# Altium PCB 3 Phase NPC Inverter.PcbDoc (part 1 of 2)
Units mm, origin at the board's own origin, x right, y up, seen from the top; angles counter-clockwise.
Board outline 302.85 x 157.72 mm, 6 copper layers (Top Layer, Reg_10_Pos, Pulse_Pos, Pulse_Neg, Reg_10_GND, Bottom Layer), stack 0.816 mm thick; 134 components, 89 nets, 487 pads, 1180 vias.
Unrouted connection lines stored in the file: 6.
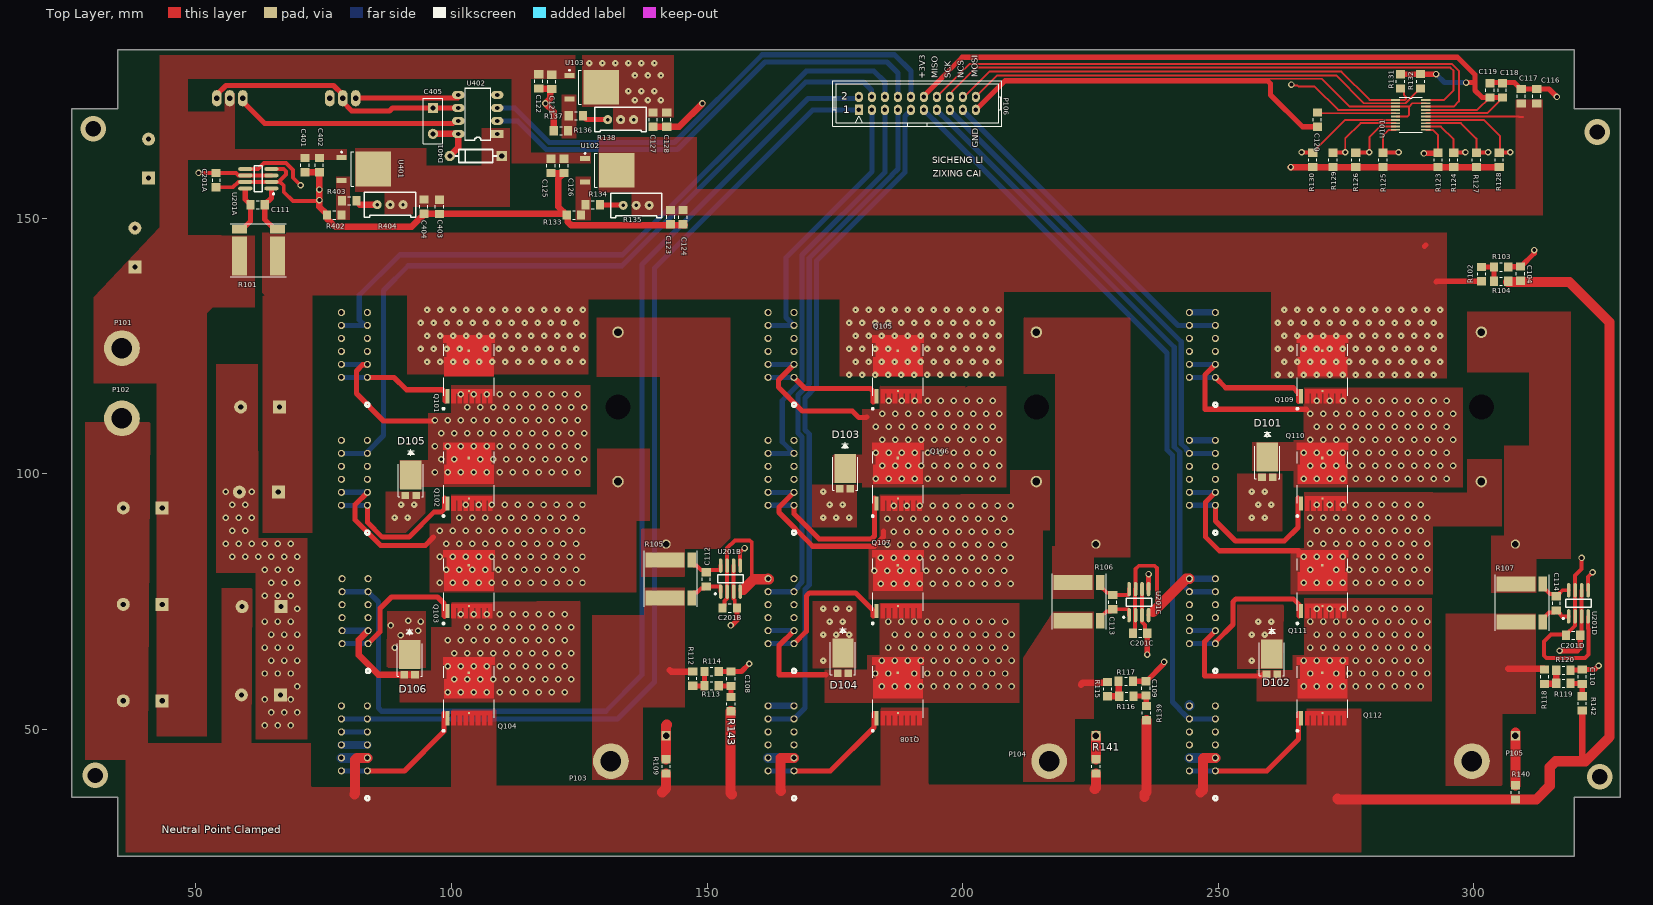
[diagram p0: Top Layer view]
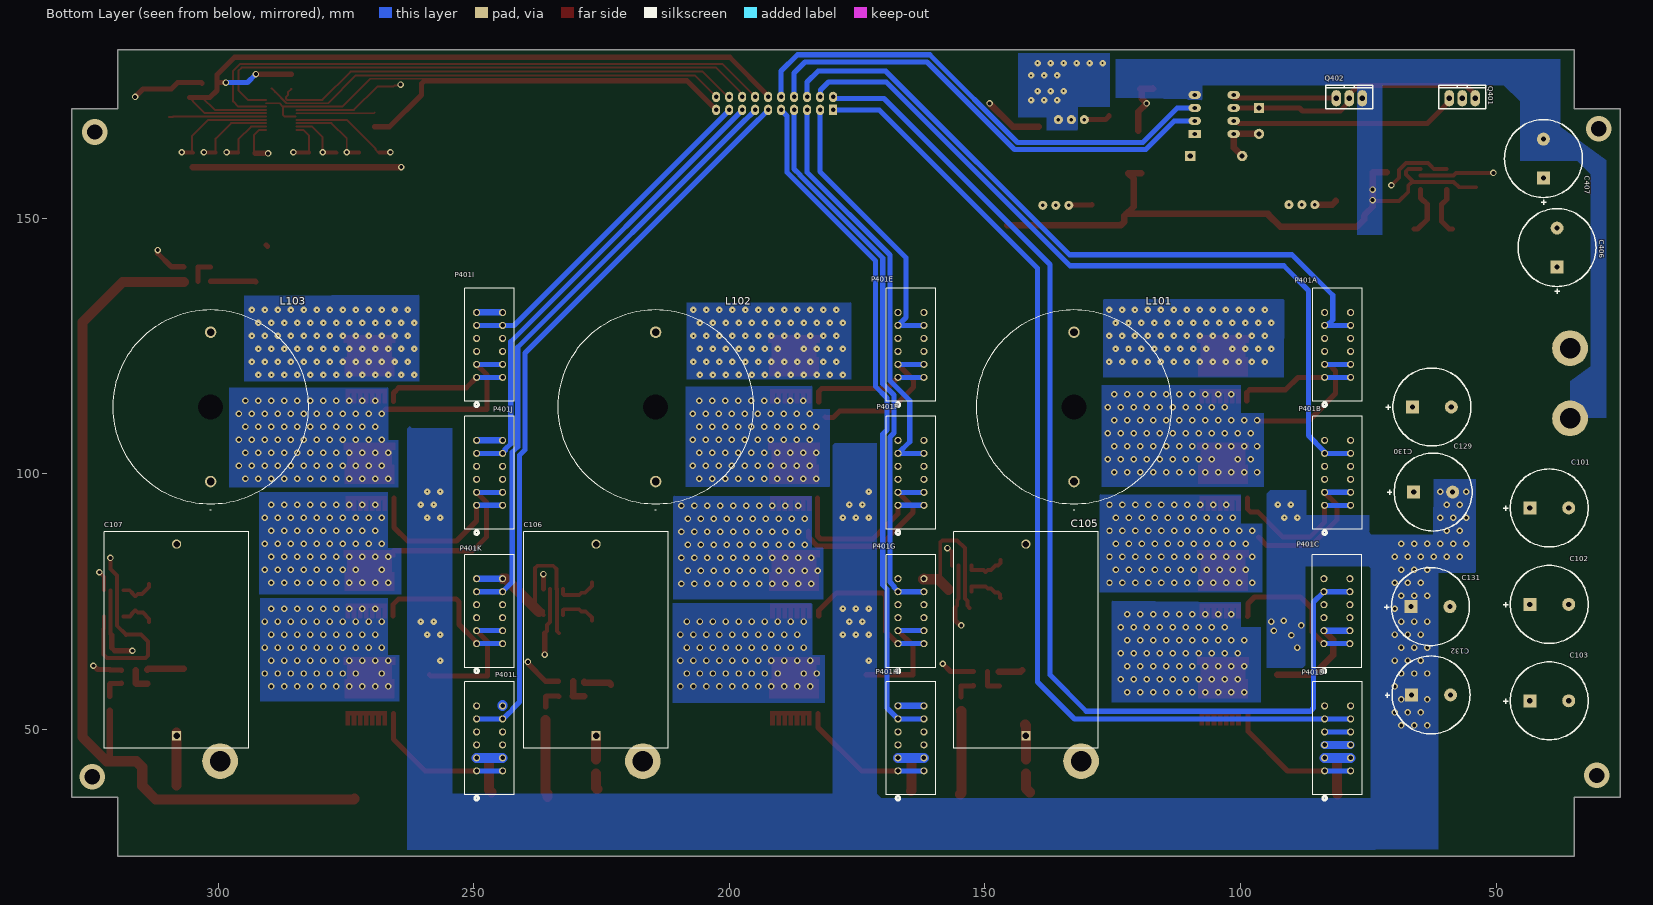
[diagram p1: Bottom Layer view, seen from below]
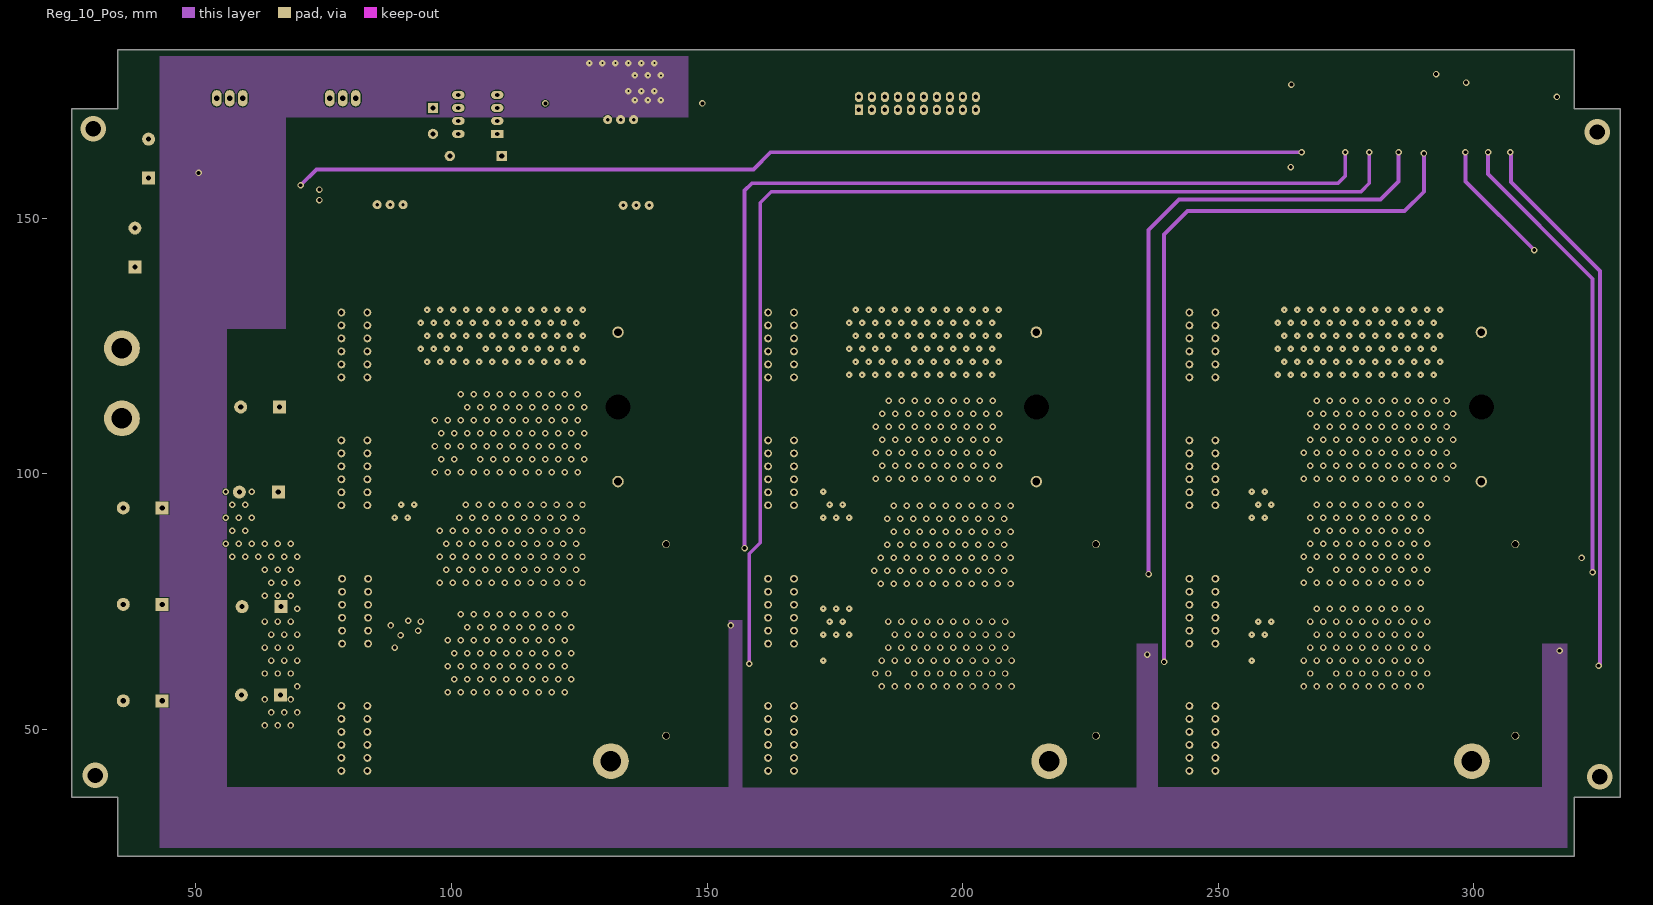
[diagram p2: Reg_10_Pos]
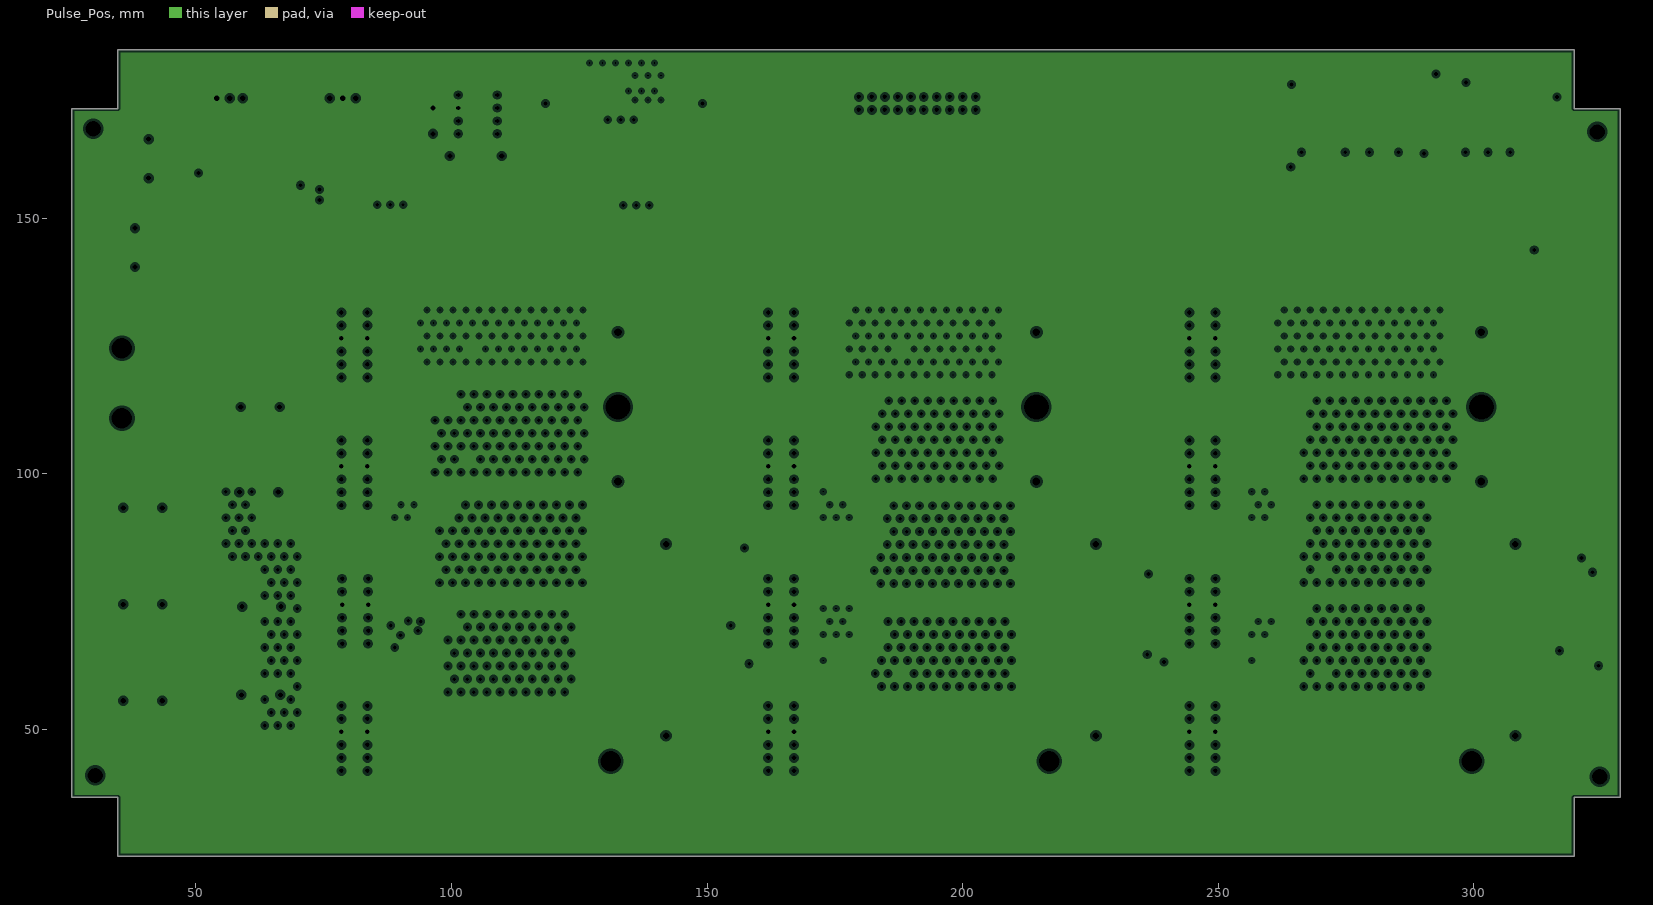
[diagram p3: Pulse_Pos, clearances drawn from the general rule]
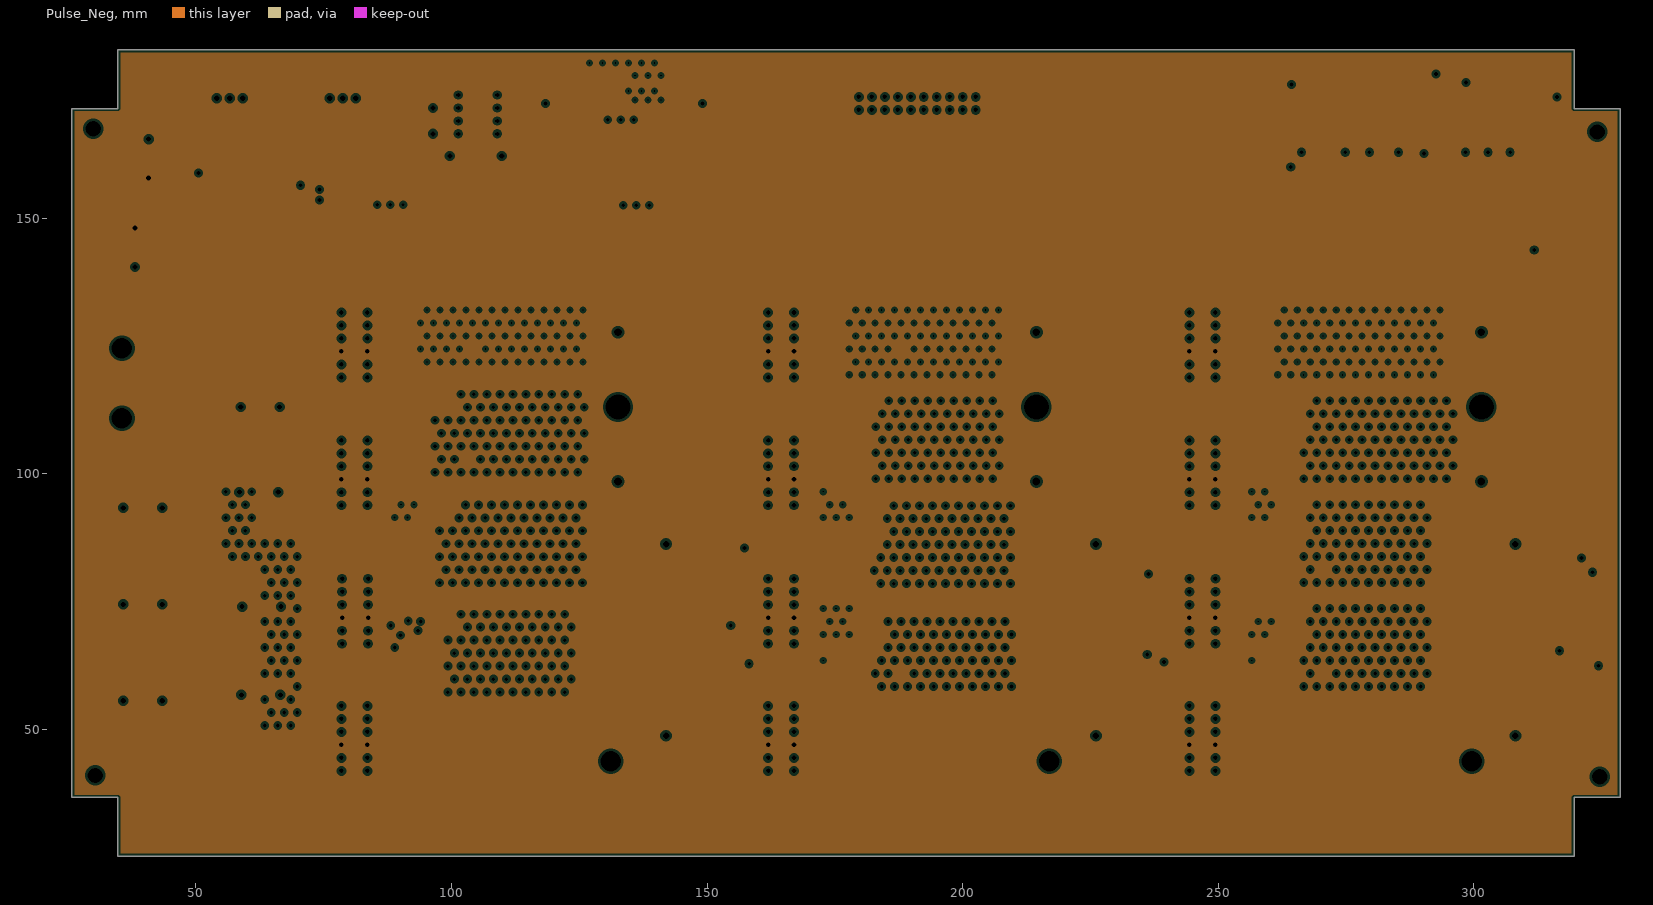
[diagram p4: Pulse_Neg, clearances drawn from the general rule]
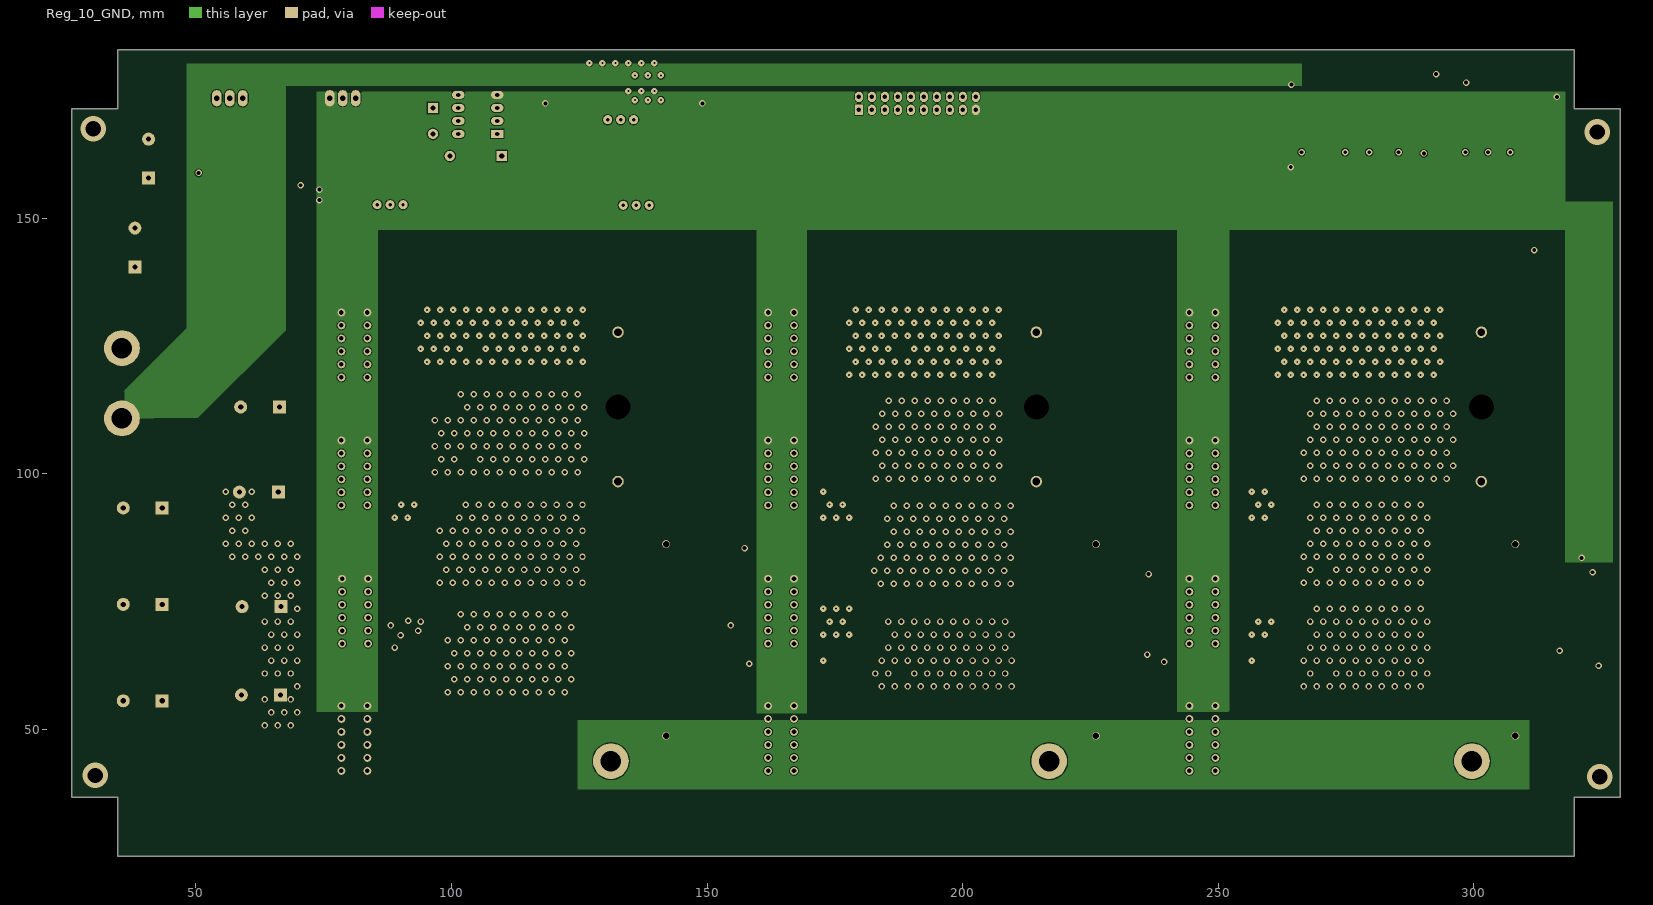
[diagram p5: Reg_10_GND]
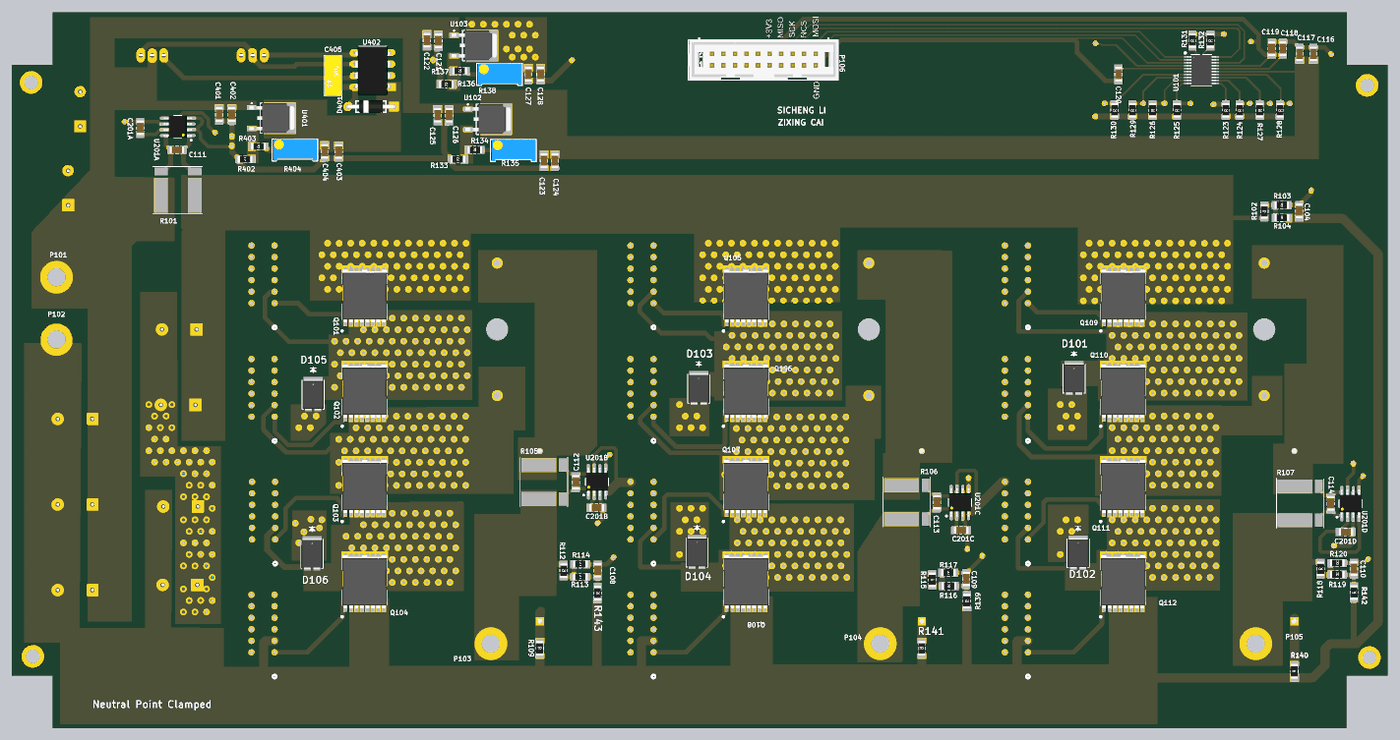
[diagram p7: 3D render of the assembled board from above, using the file's embedded part models]
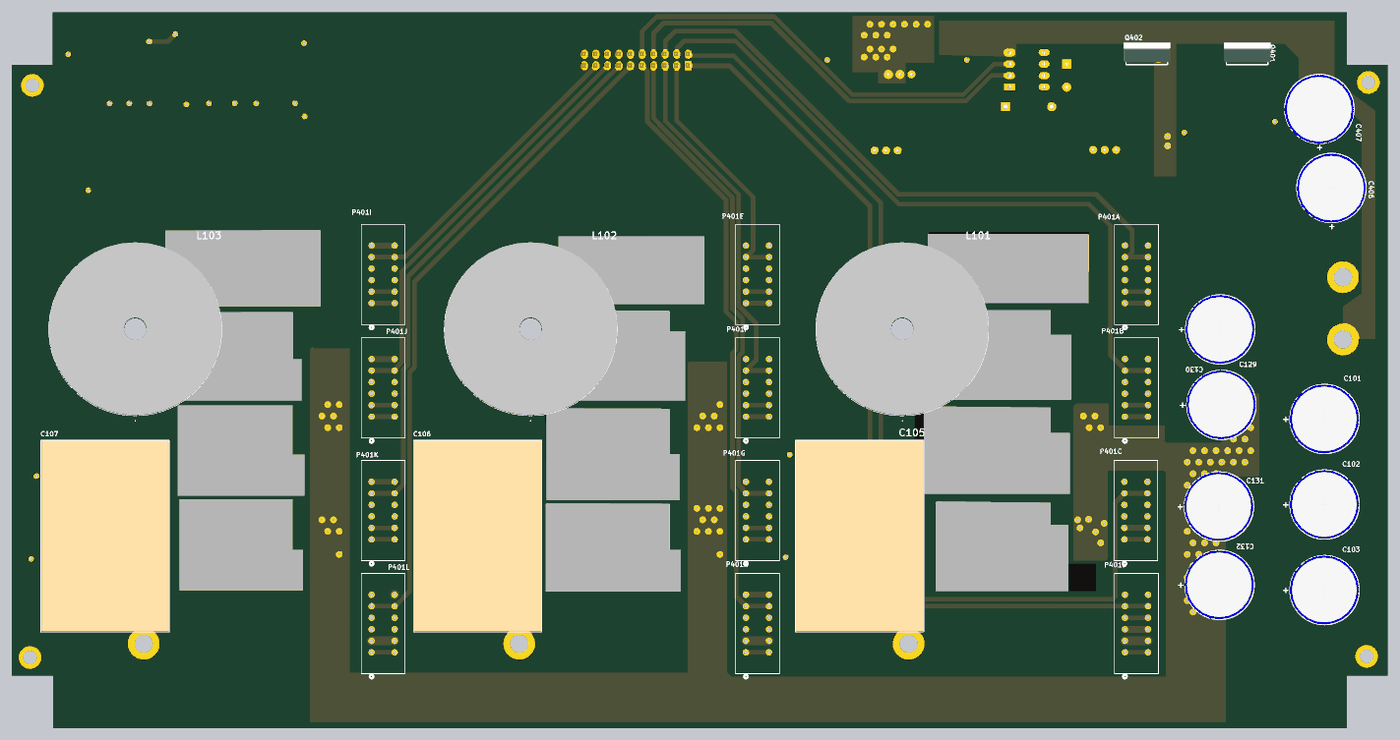
[diagram p8: 3D render of the assembled board from below, using the file's embedded part models]

## Layer stack, top to bottom
Top Solder: solder mask 0.0102, Solder Resist, Dk 3.5
Top Layer: signal copper 0.0356
Dielectric 4: prepreg 0.0711, PP-006, Dk 4.1
Reg_10_Pos: signal copper 0.035
Dielectric 2: prepreg 0.0711, PP-006, Dk 4.1
Pulse_Pos: plane copper 0.035, net HN
Dielectric 1: prepreg 0.32, FR-4, Dk 4.8
Pulse_Neg: plane copper 0.035, net NetC406_2
Dielectric 3: prepreg 0.0711, PP-006, Dk 4.1
Reg_10_GND: signal copper 0.035
Dielectric 5: prepreg 0.0711, PP-006, Dk 4.1
Bottom Layer: signal copper 0.0356
Bottom Solder: solder mask 0.0102, Solder Resist, Dk 3.5

## Board outline
25.752,171.447 34.624,171.447 ccw(c34.624,171.574) 34.752,171.574 34.752,182.947 319.597,182.947 319.597,171.574 ccw(c319.724,171.574) 319.724,171.447 328.597,171.447 328.597,36.734 319.705,36.734 ccw(c319.705,36.607) 319.578,36.607 319.578,25.226 34.758,25.226 34.758,36.599 ccw(c34.631,36.599) 34.631,36.726 25.752,36.726

## Design rules (kind name [scope] priority, off if disabled: settings)
Clearance GND [InNamedPolygon('DGND_L01_P019')] p1: gap=1.27 ignorepadtopadclearanceinfootprint=TRUE
Clearance DGND_1 [InNamedPolygon('DGND_L02_P001')] p2: gap=1.016 ignorepadtopadclearanceinfootprint=TRUE
Clearance Clearance_2 [InNamedPolygon('DGND_L02_P001')] p3: gap=1.27 ignorepadtopadclearanceinfootprint=TRUE
Clearance [InComponent('U101')] p4: gap=0.178 ignorepadtopadclearanceinfootprint=TRUE
Clearance Clearance_1 [All] p5: gap=0.178 ignorepadtopadclearanceinfootprint=TRUE
Height [All] p1: minheight=0 maxheight=254 prefheight=12.7
HoleSize [All] p1: absolutevalues=TRUE maxlimit=7.62 minlimit=0.025 maxpercent=80.000 minpercent=20.000
MinimumSolderMaskSliver [All] p1: minsoldermaskwidth=0
PlaneClearance [All] p1: clearance=0.508
PlaneConnect [All] p1: planeconnectstyle=Direct reliefexpansion=0.508 reliefentries=4 reliefconductorwidth=0.254 reliefairgap=0.254
PolygonConnect [All] p1: connectstyle=Direct reliefconductorwidth=0.254 reliefentries=4 polygonreliefangle="90 Angle" airgapwidth=0.254
RoutingVias [All] p1: holewidth=0.711 width=1.27 viastyle="Through Hole" minholewidth=0.254 minwidth=0.254 maxholewidth=2.54 maxwidth=2.54
SilkToSilkClearance [All] p1: silktosilkclearance=0
SilkToSolderMaskClearance [IsPad] p1: minsilkscreentomaskgap=0 clearancetoexposedcopper=TRUE
SolderMaskExpansion [All] p1: expansion=0.102 istentingtop=FALSE
SupplyNets "Schematic Supply Nets_1" [InNet('GND')] p1: voltage=0.000
SupplyNets "Schematic Supply Nets_8" [InNet('+10')] p2: voltage=0.000
SupplyNets "Schematic Supply Nets_7" [InNet('+48')] p3: voltage=0.000
SupplyNets "Schematic Supply Nets_5" [InNet('+10D')] p4: voltage=0.000
SupplyNets "Schematic Supply Nets_4" [InNet('+3V3')] p5: voltage=0.000
SupplyNets "Schematic Supply Nets" [InNet('+12')] p6: voltage=0.000
Width [All] p1: maxlimit=10 minlimit=0.254 preferedwidth=1.016 midlayer1_prefwidth=0.254 minimp=50.000000 maximp=50.000000 favimp=50.000000
23 further rules are at their usual default settings.

## Classes and differential pairs
channel class GateDriver: GateDriver1 GateDriver2 GateDriver3 GateDriver4 GateDriver5 GateDriver6 GateDriver7 GateDriver8 GateDriver9 GateDriver10 GateDriver11 GateDriver12
channel class Current_Sensor: Current_Sensor1 Current_Sensor2 Current_Sensor3 Current_Sensor4
component class Pulse_generator: C401 C402 C403 C404 C405 C406 C407 D401 Q401 Q402 R402 R403 R404 U401 U402
component class "3 phase NPC inverter": C101 C102 C103 C104 C105 C106 C107 C108 C109 C110 C111 C112 C113 C114 C116 C117 C118 C119 C120 C121 C122 C123 C124 C125 C126 C127 C128 C129 C130 C131 C132 D101 D102 D103 D104 D105 D106 L101 L102 L103 P101 P102 P103 P104 P105 P106 Q101 Q102 Q103 Q104 Q105 Q106 Q107 Q108 Q109 Q110 Q111 Q112 R101 R102 R103 R104 R105 R106 R107 R109 R112 R113 R114 R115 R116 R117 R118 R119 R120 R123 R124 R125 R126 R127 R128 R129 R130 R131 R132 R133 R134 R135 R136 R137 R138 R139 R140 R141 R142 R143 U101 U102 U103
component class GateDriver12: P401L
component class GateDriver11: P401K
component class GateDriver10: P401J
component class GateDriver9: P401I
component class GateDriver8: P401H
component class GateDriver7: P401G
component class GateDriver6: P401F
component class GateDriver5: P401E
component class GateDriver4: P401D
component class GateDriver3: P401C
component class GateDriver2: P401B
component class GateDriver1: P401A
component class Current_Sensor4: C201D U201D
component class Current_Sensor3: C201C U201C
component class Current_Sensor2: C201B U201B
component class Current_Sensor1: C201A U201A

## Components (designator, comment, footprint, x,y, rotation, side; value= is the part's Value field where it differs from the comment)
C101 "330U" CAPP300-600_AUT 43.434,93.345 r0 bottom
C102 "330U" CAPP300-600_AUT 43.434,74.486 r0 bottom
C103 "330U" CAPP300-600_AUT 43.434,55.626 r0 bottom
C104 "1U" CAP_1206 309.118,137.789 r90 top
C105 "68 u" B32526R3686K000 142.748,67.564 r90 bottom
C106 "68 u" B32526R3686K000 226.822,67.564 r90 bottom
C107 "68 u" B32526R3686K000 308.864,67.564 r90 bottom
C108 "1U" CAP_1206 154.685,58.541 r90 top
C109 "1U" CAP_1206 235.839,56.642 r90 top
C110 "1U" CAP_1206 321.183,58.928 r90 top
C111 "1U" CAP_1206 63.5,152.654 r180 top
C112 "1U" CAP_1206 149.86,77.972 r90 top
C113 "1U" CAP_1206 229.362,73.533 r90 top
C114 "1U" CAP_1206 316.103,73.273 r90 top
C116 "100n" CAP_1206 312.293,175.266 r270 top
C117 "1u" CAP_1206 309.245,175.266 r270 top
C118 "100n" CAP_1206 305.562,176.403 r270 top
C119 "1u" CAP_1206 303.149,176.403 r270 top
C120 "680n" CAP_1206 269.367,167.888 r90 top
C121 "10u" CAP_1206 119.634,175.26 r90 top
C122 "100n" CAP_1206 117.094,175.381 r90 top
C123 "10u" CAP_1206 142.875,148.844 r90 top
C124 "100n" CAP_1206 145.288,148.838 r90 top
C125 "10u" CAP_1206 119.465,158.84 r90 top
C126 "100n" CAP_1206 122.005,158.84 r90 top
C127 "10u" CAP_1206 139.446,167.894 r90 top
C128 "100n" CAP_1206 142.113,167.888 r90 top
C129 "330U" CAPP300-600_AUT 66.142,96.449 r0 bottom
C130 "330U" CAPP300-600_AUT 66.396,113.086 r0 bottom
C131 "330U" CAPP300-600_AUT 66.548,56.769 r0 bottom
C132 "330U" CAPP300-600_AUT 66.675,74.041 r0 bottom
C201A "100n" CAP_1206 53.975,156.077 r90 top (schematic designator C201)
C201B "100n" CAP_1206 153.029,73.787 r0 top (schematic designator C201)
C201C "100n" CAP_1206 233.293,68.834 r0 top (schematic designator C201)
C201D "100n" CAP_1206 318.002,68.453 r0 top (schematic designator C201)
C401 "10u" CAP_1206 71.374,159.004 r90 top
C402 "100n" CAP_1206 74.168,159.004 r90 top
C403 "1u" CAP_1206 97.663,150.837 r90 top
C404 "100n" CAP_1206 94.615,150.87 r90 top
C405 "100n" RAD-0.2_AUT 96.393,169.037 r270 top
C406 "470u" CAPP300-600_AUT 38.1,140.462 r270 bottom
C407 "470u" CAPP300-600_AUT 40.767,157.861 r270 bottom
D101 "FSV20100V" SOT_20100V_ONS-M 259.588,102.248 r0 top
D102 "FSV20100V" SOT_20100V_ONS-M 260.477,63.754 r0 top
D103 "FSV20100V" SOT_20100V_ONS-M 176.987,100.038 r0 top
D104 "FSV20100V" SOT_20100V_ONS-M 176.581,63.894 r0 top
D105 "FSV20100V" SOT_20100V_ONS-M 92.05,98.692 r0 top
D106 "FSV20100V" SOT_20100V_ONS-M 91.821,63.627 r0 top
D401 "1N4007" DIODE0.4_AUT 109.855,162.179 r180 top
L101 "330u" 1140-331K-RC 132.588,113.106 r90 bottom
L102 "330u" 1140-331K-RC 214.401,113.106 r90 bottom
L103 "330u" 1140-331K-RC 301.447,113.106 r90 bottom
P101 "Banana_Power" Banana_Power 35.56,124.587 r0 top
P102 "Banana_Power" Banana_Power 35.56,110.871 r0 top
P103 "Banana_Power" Banana_Power 131.191,43.815 r0 top
P104 "Banana_Power" Banana_Power 216.916,43.815 r0 top
P105 "Banana_Power" Banana_Power 299.593,43.815 r0 top
P106 "Box Header 10X2/S" FKV20SN_AUT 191.135,172.466 r0 top
P401A "EBC06DCWN" CONN12_EBC06DCWN_SUL 81.153,125.222 r90 bottom (schematic designator P401)
P401B "EBC06DCWN" CONN12_EBC06DCWN_SUL 81.153,100.203 r90 bottom (schematic designator P401)
P401C "EBC06DCWN" CONN12_EBC06DCWN_SUL 81.28,73.152 r90 bottom (schematic designator P401)
P401D "EBC06DCWN" CONN12_EBC06DCWN_SUL 81.153,48.26 r90 bottom (schematic designator P401)
P401E "EBC06DCWN" CONN12_EBC06DCWN_SUL 164.592,125.222 r90 bottom (schematic designator P401)
P401F "EBC06DCWN" CONN12_EBC06DCWN_SUL 164.592,100.203 r90 bottom (schematic designator P401)
P401G "EBC06DCWN" CONN12_EBC06DCWN_SUL 164.592,73.152 r90 bottom (schematic designator P401)
P401H "EBC06DCWN" CONN12_EBC06DCWN_SUL 164.592,48.26 r90 bottom (schematic designator P401)
P401I "EBC06DCWN" CONN12_EBC06DCWN_SUL 247.015,125.222 r90 bottom (schematic designator P401)
P401J "EBC06DCWN" CONN12_EBC06DCWN_SUL 247.015,100.203 r90 bottom (schematic designator P401)
P401K "EBC06DCWN" CONN12_EBC06DCWN_SUL 247.015,73.152 r90 bottom (schematic designator P401)
P401L "EBC06DCWN" CONN12_EBC06DCWN_SUL 247.015,48.26 r90 bottom (schematic designator P401)
Q101 "MCTL80N20Y-TP" TOLL-8L 108.712,113.538 r90 top
Q102 "MCTL80N20Y-TP" TOLL-8L 108.712,92.541 r90 top
Q103 "MCTL80N20Y-TP" TOLL-8L 108.712,71.543 r90 top
Q104 "MCTL80N20Y-TP" TOLL-8L 108.712,50.546 r90 top
Q105 "MCTL80N20Y-TP" TOLL-8L 192.659,113.538 r90 top
Q106 "MCTL80N20Y-TP" TOLL-8L 192.659,92.541 r90 top
Q107 "MCTL80N20Y-TP" TOLL-8L 192.659,71.543 r90 top
Q108 "MCTL80N20Y-TP" TOLL-8L 192.659,50.546 r90 top
Q109 "MCTL80N20Y-TP" TOLL-8L 275.717,113.538 r90 top
Q110 "MCTL80N20Y-TP" TOLL-8L 275.717,92.541 r90 top
Q111 "MCTL80N20Y-TP" TOLL-8L 275.717,71.543 r90 top
Q112 "MCTL80N20Y-TP" TOLL-8L 275.717,50.546 r90 top
Q401 "IPP029N15NM6" TO-220V 56.642,173.482 r180 bottom
Q402 "IPP029N15NM6" TO-220V 78.74,173.482 r180 bottom
R101 "10m" WSL3673R_002-01 56.642,138.43 r0 top
R102 "1K8" RES_1206 301.498,140.468 r270 top
R103 "100R" RES_1206 306.705,140.462 r180 top
R104 "8K2" RES_1206 306.711,137.668 r180 top
R105 "10m" WSL3673R_002-01 137.541,85.09 r270 top
R106 "10m" WSL3673R_002-01 217.424,80.645 r270 top
R107 "10m" WSL3673R_002-01 304.038,80.391 r270 top
R109 "0R" RES_1206 141.986,44.196 r270 top
R112 "1K8" RES_1206 147.192,58.547 r90 top
R113 "8K2" RES_1206 152.278,58.547 r180 top
R114 "100R" RES_1206 152.278,61.341 r180 top
R115 "1K8" RES_1206 228.346,56.515 r90 top
R116 "8K2" RES_1206 233.426,56.515 r180 top
R117 "100R" RES_1206 233.299,59.436 r180 top
R118 "1K8" RES_1206 313.817,58.928 r90 top
R119 "8K2" RES_1206 318.897,59.055 r180 top
R120 "100R" RES_1206 318.897,61.595 r180 top
R123 "1K" RES_1206 292.989,160.014 r90 top
R124 "1K" RES_1206 296.037,160.014 r90 top
R125 "1K" RES_1206 282.194,160.014 r90 top
R126 "1K" RES_1206 276.86,160.014 r90 top
R127 "1K" RES_1206 300.482,160.014 r90 top
R128 "1K" RES_1206 304.927,160.014 r90 top
R129 "1K" RES_1206 272.415,160.014 r90 top
R130 "1K" RES_1206 268.478,160.014 r90 top
R131 "1K" RES_1206 285.623,175.381 r90 top
R132 "1K" RES_1206 289.56,175.387 r90 top
R133 "18K2" RES_1206 122.555,150.622 r0 top
R134 "1K8" RES_1206 129.032,152.654 r180 top
R135 "500R" 3296W 136.144,152.527 r180 top
R136 "18K2" RES_1206 120.009,167.132 r0 top
R137 "2K2" RES_1206 125.736,170.053 r180 top
R138 "500R" 3296W 133.096,169.291 r180 top
R139 "0R" RES_1206 235.966,51.816 r90 top
R140 "0R" RES_1206 308.102,39.116 r270 top
R141 "0R" RES_1206 226.06,44.196 r270 top
R142 "0R" RES_1206 321.183,53.721 r90 top
R143 "0R" RES_1206 154.686,53.594 r90 top
R402 "18K2" RES_1206 75.686,150.622 r0 top
R403 "2K2" RES_1206 81.407,153.416 r180 top
R404 "500R" 3296W 88.011,152.654 r180 top
U101 "AD7328BRUZ" TSSOP20_44 283.566,166.233 r0 top
U102 "LR12K4-G" "D PAK (TO-252-3)" 124.642,163.322 r270 top
U103 "LR12K4-G" "D PAK (TO-252-3)" 121.594,179.578 r270 top
U201A "INA241A3IDR" SOIC8_M 66.694,160.742 r180 top (schematic designator U201)
U201B "INA241A3IDR" SOIC8_M 157.567,75.058 r90 top (schematic designator U201)
U201C "INA241A3IDR" SOIC8_M 237.45,70.466 r90 top (schematic designator U201)
U201D "INA241A3IDR" SOIC8_M 323.429,70.232 r90 top (schematic designator U201)
U401 "LR12K4-G" "D PAK (TO-252-3)" 77.017,163.576 r270 top
U402 "IR2101" DIP8_AUT 110.287,175.463 r180 top

## Footprints (in the part's own frame and the unit in brackets; to place one, negate y for a bottom-side part, rotate by r counter-clockwise, add the part's x,y. Pads: shape width x height; smd on the part's side, far side on the other; paste and mask are expansions set on the pad)
1140-331K-RC [mil] "Lead Spacing = 1.15 in / 1140-331K-RC"
  round 88.31 hole 58.87: 1(-575,0) 2(575,0)
  round 96.5 hole 193 unplated: 3(0,0)
  silkscreen extent -795,-750 750,750, body extent -745,-750 755,750, height 1031
3296W [mil] "3296 - 3/8 ?Square Trimpot, Trimming Potentiometer"
  round 70 hole 25: 1(100,0) 2(-100,0) W(0,0)
  silkscreen extent -198,-95 198,95, body extent -189,-96 186,94, height 458
B32526R3686K000 [mil] "Lead Spacing 1.476\" (37.50mm)"
  rect 71x71 / inner round 60 / far side rect 71x71 hole 51 paste-99999 mask+0: 1(-740,-30)
  round 71 / inner round 60 / far side round 71 hole 51 paste-99999 mask-35.5: 2(736.38,-30)
  silkscreen extent -834,-586 830,526, body extent -827,-582 827,520, height 1673
Banana_Power [mm]
  round 7 hole 4: 1(0,0)
CAP_1206 [mm] "Body 3.2 x 1.6 mm (LxW typ)"
  rect 1.6x1.8 smd: 1(0,0) 2(2.8,0)
  silkscreen extent 1.1,-0.8 1.7,0.8, body extent -0.15,-0.81 3.05,0.79, height 1.6
CAPP300-600_AUT [mil] "Capacitor, Electrolytic, Radial, Snap-In Pins; Pin Spacing 300 mil; Body 600mil (Dia)"
  rect 100x100 hole 40: 1(0,0)
  round 100 hole 40: 2(-300,0)
  silkscreen extent -450,-300 204,300, body extent -449,-302 153,300, height 599
CONN12_EBC06DCWN_SUL [mil] "CONN EDGE DUAL FMALE 12POS 0.100"
  round 55 / inner round 60 / far side round 55 hole 35 paste-99999 mask+0: 1(-250,-105) 1(-250,95) 2(-150,-105) 2(-150,95) 3(-50,-105) 3(-50,95) 4(50,-105) 4(50,95) 5(150,-105) 5(150,95) 6(250,-105) 6(250,95)
  silkscreen extent -475,-195 435,185
"D PAK (TO-252-3)" [mm] "D-PAK,  Body 6.1x6.5mm, Pitch 2.28mm, Lead Span 9.7mm"
  rect 0.95x1.9 smd: 1(1.657,1.492) 3(6.217,1.492)
  rect 6.8x6.9 smd: 2(3.937,7.692)
  silkscreen extent 0.51,1.37 7.29,3.84, body extent 0.64,0.98 7.18,10.92, height 2.34
DIODE0.4_AUT [mil] "Diode, Axial; Body 5.2 x 2.7 mm (LxDia. max), Pin Distance, 400mil"
  rect 80x80 hole 40: A(0,0)
  round 80 hole 40: K(400,0)
  silkscreen extent 40,-50 360,50, body extent -18,-54 416,53, height 107
DIP8_AUT [mil] "DIP8 100mil pitch, 300mil row."
  rect 96x62 hole 32: 1(52,353)
  oval 96x62 hole 32: 2(52,253) 3(52,153) 4(52,53) 5(352,53) 6(352,153) 7(352,253) 8(352,353)
  silkscreen extent 102,3 302,403, body extent 47,-7 357,423, height 200
FKV20SN_AUT [mil] "Box Headers; 20 Position; Dual Line; Pitch, 100 mil"
  rect 62x80 hole 35: 1(-450,-50)
  oval 62x80 hole 35: 2(-450,50) 3(-350,-50) 4(-350,50) 5(-250,-50) 6(-250,50) 7(-150,-50) 8(-150,50) 9(-50,-50) 10(-50,50) 11(50,-50) 12(50,50) 13(150,-50) 14(150,50) 15(250,-50) 16(250,50) 17(350,-50) 18(350,50) 19(450,-50) 20(450,50)
  silkscreen extent -650,-175 650,175, body extent -642,-173 654,197, height 371
RAD-0.2_AUT [mil] "Indicating Instrument; 2 Leads; Distance 200mil"
  rect 80x80 hole 40: 1(-100,0)
  round 80 hole 40: 2(100,0)
  silkscreen extent -175,-75 175,75, body extent -175,-75 175,75, height 310
RES_1206 [mm] "Body 3.2 x 1.6 mm (LxW typ)"
  rect 1.6x1.8 smd: 1(0,0) 2(2.8,0)
  silkscreen extent 1.14,-0.8 1.65,0.8, body extent -0.21,-0.8 2.96,0.75, height 0.6
SOIC8_M [mm] "SOIC8 General medium width 3-5 mm"
  oval 2.8x0.7 smd: 1(1.904,4.913) 2(1.904,3.643) 3(1.904,2.373) 4(1.904,1.103) 5(7.004,1.103) 6(7.004,2.373) 7(7.004,3.643) 8(7.004,4.913)
  silkscreen extent 1.33,0.51 5.25,6.12, body extent 1.39,0.56 7.52,5.45, height 1.76
SOT_20100V_ONS-M [mil]
  rect 59x57 smd paste+0 mask+0: 1(41.34,-114.5) 2(-41.34,-114.5)
  rect 165x223 smd paste+0 mask+0: 3(0,41.5)
  silkscreen extent -96,-126 96,241, body extent -91,-131 91,131, height 49
TO-220V [mil] "TO, Thru-Hole, Transistor, Vertical, Heatsink Mounted; 3 In-Line Leads; Pitch 2.54 mm"
  oval 75x125 hole 40: 1(-100,0) 2(0,0) 3(100,0)
  silkscreen extent -180,-80 180,100, body extent -204,-59 204,110, height 762
TOLL-8L [mm] "TOLL-8L"
  rect 2.8x0.8 smd paste-2: 1(1.659,9.509)
  rect 0.4x0.4 smd paste-1 mask+0: 2(2.659,5.309)
  rect 0.5x0.5 smd paste-1 mask+0: 3(10.574,5.359)
  Top Layer region: 13.559,0.259 12.159,0.259 12.159,0.959 9.259,0.959 9.259,0.459 5.559,0.459 5.559,10.159 9.259,10.159 9.259,9.659 12.159,9.659 12.159,10.359 13.559,10.359
  Top Layer region: 3.059,0.709 0.259,0.709 0.259,1.509 2.259,1.509 2.259,1.909 0.259,1.909 0.259,2.709 2.259,2.709 2.259,3.109 0.259,3.109 0.259,3.909 2.259,3.909 2.259,4.309 0.259,4.309 0.259,5.109 2.259,5.109 2.259,5.509 0.259,5.509 0.259,6.309 2.259,6.309 2.259,6.709 0.259,6.709 0.259,7.509 2.259,7.509 2.259,7.909 0.259,7.909 0.259,8.709 3.059,8.709
  silkscreen extent -0.99,0.36 11.84,10.46, body extent 1.07,0.36 12.75,10.26, height 2.4
TSSOP20_44 [mil] "TSSOP20 4.4mm SMD DIL"
  round 30 on Top Overlay mask+2.01: 1(19,307)
  rect 70x14 smd paste+0 mask+0: 1(44,272.16) 2(44,246.57) 3(44,220.98) 4(44,195.39) 5(44,169.8) 6(44,144.2) 7(44,118.61) 8(44,93.02) 9(44,67.43) 10(44,41.84) 11(276,41.84) 12(276,67.43) 13(276,93.02) 14(276,118.61) 15(276,144.2) 16(276,169.8) 17(276,195.39) 18(276,220.98) 19(276,246.57) 20(276,272.16)
  silkscreen extent 70,22 250,293, body extent 34,27 286,287, height 47
WSL3673R_002-01 [mil] "Kelvin 4W current Shunt"
  rect 116x300 smd mask+2.01: 1(75,165) 4(369,165)
  rect 116x66 smd mask+2.01: 2(75,372) 3(369,372)
  silkscreen extent 5,5 435,415

## Part data
C101 C102 C103 C129 C130 C131 C132 C406 C407: library part CAPP300-600, "Polarized Aluminum Capacitor, Through Hole, Pitch 300mil, Body 600mil (Dia)"
C104 C108 C109 C110 C111 C112 C113 C114 C116 C117 C118 C119 C120 C121 C122 C123 C124 C125 C126 C127 C128 C201A C201B C201C C201D C401 C402 C403 C404: library part "CAPN 1206", "Non Polarized Capacitor, SMD, 1206"
C105 C106 C107: library part B32526R3686K000, "68 µF Film Capacitor 160V 250V Polyester, Polyethylene Terephthalate (PET), Metallized Radial /  / https://www.digikey.co.nz/en/products/detail/epcos-tdk-electronics/B32526R3686K000/3490213", ComponentLink1Description="New link", ComponentLink1URL=https://www.digikey.co.nz/en/products/detail/epcos-tdk-electronics/B32526R3686K000/3490213
C405: library part "CAPN RAD0.2", "Non Polarized Capacitor, Multilayer Ceramic Dipped Radial, Pitch 200mil"
D101 D102 D103 D104 D105 D106: "Diode 100 V 20A Surface Mount TO-277-3 /  / https://www.digikey.co.nz/en/products/detail/onsemi/FSV20100V/5306665", ComponentLink1Description="New link", ComponentLink1URL=https://www.digikey.co.nz/en/products/detail/onsemi/FSV20100V/5306665
D401: "Diode, Standard, 1A, 1000v", Supplier Part Number 1=9549129, Supplier 1=Farnell
L101 L102 L103: library part 1140-331K-RC, "Power Inductors - Leaded 330uH 10% /  / https://nz.mouser.com/ProductDetail/Bourns/1140-331K-RC?qs=wiQ7G1Lt8gwP8A01VI%2FcoA%3D%3D", ComponentLink1Description="New link", ComponentLink1URL=https://nz.mouser.com/ProductDetail/Bourns/1140-331K-RC?qs=wiQ7G1Lt8gwP8A01VI%2FcoA%3D%3D
P101 P102 P103 P104 P105: "4mm pitch"
P106: "Header, Box, 20 Way, 2.54mm, Straght", Supplier Part Number 1=8395942, Supplier 1=Farnell
P401A P401B P401C P401D P401E P401F P401G P401H P401I P401J P401K P401L: "12 Position Female Connector Non Specified - Dual Edge Gold 0.100\" (2.54mm) Blue /  / https://www.digikey.co.nz/en/products/detail/sullins-connector-solutions/EBC06DCWN/927245", ComponentLink1Description="New link", ComponentLink1URL=https://www.digikey.co.nz/en/products/detail/sullins-connector-solutions/EBC06DCWN/927245
Q101 Q102 Q103 Q104 Q105 Q106 Q107 Q108 Q109 Q110 Q111 Q112: "N-Channel 200 V 80A (Tc) 250W (Tj) Surface Mount TOLL-8L"
Q401: library part FQP65N06, "Insulated-Gate Field-Effect Transistor (IGFET), N-Channel, Enhancement, Body Diode, Pin 1 Gate, 2 Drain, 3 Source, 3 Pins- Through Hole TO-220-3"
Q402: library part FQP65N06, "Insulated-Gate Field-Effect Transistor (IGFET), N-Channel, Enhancement, Body Diode, Pin 1 Gate, 2 Drain, 3 Source, 3 Pins - Through Hole TO-220-3"
R101 R105 R106 R107: library part WSL3673R-01, "Current Shunt  / Kelvin 4W 0.002- 0.01"
R102 R103 R104 R109 R112 R113 R114 R115 R116 R117 R118 R119 R120 R123 R124 R125 R126 R127 R128 R129 R130 R131 R132 R133 R134 R136 R137 R139 R140 R141 R142 R143 R402 R403: library part "Resistor 1206", "Resistor, SMD, 1206"
R135 R138 R404: library part 3296W-1-104LF, "3296W Series, 3/8 ” Square Potentiometer, 100k, 10%,  0.5 Watts, Multi Turn /  / Part #: PV36W501C01B00", Supplier Part Number 1=9353194, Supplier 1=Farnell
U101: "ADC 12 Bit / Package TSSOP20"
U102 U103 U401: "Adj Positive Regulator  / Linear. 12V dropout V.  / 2W"
U201A U201B U201C U201D: "Current Sense Amp"
U402: library part IR2101_DIP, "Half - Bridge Driver, MOSFET/IGBT, DIP8", Supplier Part Number 1=8638829, Supplier 1=Farnell

## Via types
v1: diameter 1.27, hole 0.711, Top Layer to Bottom Layer, 888 vias
v2: diameter 1.27, hole 0.381, Top Layer to Bottom Layer, 258 vias
v3: diameter 1.27, hole 0.762, Top Layer to Bottom Layer, 30 vias
v4: diameter 5, hole 3, Top Layer to Bottom Layer, 4 vias

## Nets (pads, with @x,y where several pads share a name; then routed paths per layer and width w, separated by ;. In a path a pad name is that pad's centre, name@x,y a point inside that pad or via, vN(x,y) a via of type N, cw(c..) or ccw(c..) an arc to the next point about the centre after c; other vN are vias at no path point)
+3V3: C118.2 C119.2 P106.12 R131.2 R132.2 U101.16 U101.17 | length 166.8
  Top Layer w0.381: U101.16@290.576,170.546 302.6,170.546 304.852,172.798 304.852,172.872 305.462,173.482 C118.2@305.562,173.482 ; U101.17@290.576,171.196 300.642,171.196 303.049,173.603 C119.2@303.149,173.603
  Top Layer w1.016: P106.12@192.405,173.736 192.278,173.736 192.278,173.838 199.923,181.483 296.799,181.483 300.228,178.054 300.228,176.53 ; R131.2@285.623,178.181 v3(292.608,178.181) ; v3(298.45,176.53) 300.228,176.53 ; C118.2@305.562,173.603 303.049,173.603 301.631,173.603 300.228,175.006 300.228,176.53
  Bottom Layer w1.016: v3(292.608,178.181) 294.259,176.53 v3(298.45,176.53)
+10: C127.2 C128.2 C201A.2 C201B.2 C201C.2 C201D.2 R138.2 R138.W U103.2 U201A.3 U201A.6 U201B.3 U201B.6 U201C.3 U201C.6 U201D.3 U201D.6 | length 55.9
  Top Layer w0.762: v3(50.546,158.877) C201A.2@53.975,158.877 57.829,158.877 58.337,158.369 U201A.3@64.79,158.369 ; U201B.6@155.194,82.062 U201B.3@155.194,76.962 155.194,75.609 155.41,75.393 155.41,74.206 C201B.2@155.829,73.787 ; U201C.6@235.077,77.47 235.077,71.017 235.674,70.42 235.674,69.253 C201C.2@236.093,68.834 ; C201D.2@320.802,68.453 321.025,68.676 321.025,77.205 U201D.6@321.056,77.236
  Top Layer w1.016: v3(154.639,70.358) 154.688,70.407 154.873,70.407 155.829,71.363 C201B.2@155.829,73.787 ; v3(236.093,64.643) C201C.2@236.093,68.834 ; v3(316.738,65.405) 320.207,65.405 320.802,66 C201D.2@320.802,68.453
  other v2: 135.89,173.101 138.43,173.101 140.97,173.101 134.62,174.879 137.16,174.879 139.7,174.879 135.89,177.927 138.43,177.927 140.97,177.927 127,180.34 129.54,180.34 132.08,180.34 134.62,180.34 137.16,180.34 139.7,180.34
+10D: C403.2 C404.2 D401.A R404.2 R404.W U401.2 U402.1
+12: C116.2 C117.2 C123.2 C124.2 R135.2 R135.W U101.15 U102.2 | length 19.1
  Top Layer w0.381: U101.15@290.576,169.896 308.767,169.896 308.864,169.799 309.626,169.799
+48: C101.1 C102.1 C103.1 C121.2 C122.2 C125.2 C126.2 C401.2 C402.2 C406.1 P101.1 Q401.2 R101.1 U102.1 U103.1 U401.1
GND: C101.2 C102.2 C103.2 C104.1 C116.1 C117.1 C118.1 C119.1 C120.1 C121.1 C122.1 C123.1 C124.1 C125.1 C126.1 C127.1 C128.1 C131.2 C132.2 C201A.1 C201B.1 C201C.1 C201D.1 C401.1 C402.1 C403.1 C404.1 C407.2 P102.1 P106.19 P401A.6 P401B.6 P401C.6 P401D.2 P401D.6 P401E.6 P401F.6 P401G.6 P401H.2 P401H.6 P401I.6 P401J.6 P401K.6 P401L.2 P401L.6 Q104.2 Q108.2 Q112.2 Q402.3 R104.1 R109.2 R123.1 R124.1 R125.1 R126.1 R127.1 R128.1 R129.1 R130.1 R133.1 R136.1 R139.1 R140.2 R141.2 R142.1 R143.1 R402.1 U101.3 U101.4 U101.6 U101.19 U201A.2 U201A.4 U201A.7 U201B.2 U201B.4 U201B.7 U201C.2 U201C.4 U201C.7 U201D.2 U201D.4 U201D.7 U402.4 | length 723.5
  Top Layer w0.381: 259.628,176.911 260.009,177.292 270.256,177.292 275.702,171.846 U101.3@284.683,171.846 287.311,171.846 ; v3(264.287,176.149) 264.457,175.979 265.473,175.979 265.684,175.768 268.859,175.768 273.431,171.196 U101.4@284.683,171.196 ; U101.6@284.874,169.896 286.99,169.896 287.311,170.217 287.311,171.846 ; U101.19@290.576,172.496 287.961,172.496 287.311,171.846
  Top Layer w0.762: C201A.1@53.975,156.077 57.315,156.077 58.337,157.099 U201A.7@59.69,157.099 U201A.2@64.79,157.099 64.821,157.13 66.198,157.13 66.334,157.266 ; U201A.4@64.79,159.639 67.183,159.639 67.629,159.193 67.629,158.561 66.334,157.266 ; v3@74.093,153.356 69.021,153.356 67.206,155.171 67.206,156.395 66.502,157.099 66.334,157.266 ; C201B.1@153.029,73.787 153.448,74.206 153.448,75.133 153.924,75.609 U201B.2@153.924,76.962 U201B.7@153.924,82.062 153.924,85.471 155.448,86.995 158.304,86.995 158.75,86.549 158.75,78.998 ; C201C.1@233.293,68.834 233.68,69.221 U201C.7@233.68,77.47 ; U201C.7@233.807,77.47 233.807,81.407 234.442,82.042 237.552,82.042 237.998,81.596 237.998,74.676 ; U201C.4@236.347,72.37 236.347,72.39 236.474,72.517 236.474,73.152 236.791,73.469 ; C201D.1@318.002,68.453 317.875,68.58 315.087,68.58 313.69,67.183 313.69,64.454 314.136,64.008 321.691,64.008 322.364,64.681 322.364,69.669 322.326,69.707 U201D.4@322.326,72.136 ; C201D.1@318.002,68.553 319.755,70.306 319.755,72.105 U201D.2@319.786,72.136 U201D.7@319.786,77.236 319.786,80.137 321.056,81.407 v3(321.056,83.566)
  Top Layer w1.016: P106.19@202.565,171.196 208.28,176.911 259.628,176.911 260.223,176.316 260.223,174.117 266.446,167.894 269.361,167.894 C120.1@269.367,167.888 ; C119.1@303.149,176.403 303.276,176.53 307.881,176.53 309.145,175.266 C117.1@309.245,175.266 C116.1@312.293,175.266 314.7,175.266 v3(316.23,173.736)
  Top Layer w1.27: C401.1@71.374,159.004 C402.1@74.168,159.004 v3(74.168,155.622) v3(74.168,153.543) 74.168,152.24 75.686,150.722 R402.1@75.686,150.622 75.851,150.457 75.851,149.715 77.23,148.336 92.203,148.336 94.721,150.853 97.646,150.853 C403.1@97.663,150.837 122.39,150.837 R133.1@122.555,150.672 ; C404.1@94.615,150.87 C404.1@94.704,150.87 ; C122.1@117.094,175.381 117.215,175.381 117.221,175.387 117.287,175.321 119.573,175.321 C121.1@119.634,175.26 119.534,175.26 119.369,175.095 119.369,173.471 v3(118.364,172.466) 120.009,170.821 R136.1@120.009,167.132 ; C125.1@119.465,158.84 121.539,158.84 C126.1@122.005,158.84 120.904,157.739 120.904,152.273 R133.1@122.555,150.622 122.72,150.457 122.72,149.334 123.464,148.59 C124.1@145.669,148.59 ; C127.1@139.446,167.894 144.526,167.894 v3(149.098,172.466) ; v3(264.16,160.02) 304.921,160.02 R128.1@304.927,160.014 ; R142.1@321.183,53.721 321.183,44.45 321.818,43.815
  Top Layer w2: 81.026,37.338 81.153,37.465 81.153,44.069 81.534,44.45 P401D.2@83.566,44.45 ; 141.224,37.719 141.986,38.481 R109.2@141.986,41.396 ; R143.1@154.686,53.594 154.559,53.594 154.559,37.592 154.813,37.338 ; 157.114,77.362 158.75,78.998 159.127,79.375 162.052,79.375 P401G.6@161.925,79.502 ; 164.465,37.973 164.338,38.1 164.338,44.45 P401H.2@167.005,44.45 ; 225.806,38.354 226.06,38.608 R141.2@226.06,41.396 ; 235.585,36.83 235.585,37.465 235.966,37.846 R139.1@235.966,51.816 ; 237.236,73.025 243.713,79.502 P401K.6@244.348,79.502 ; 246.507,37.719 247.015,38.227 247.015,44.323 247.142,44.45 P401L.2@249.428,44.45 ; 273.304,36.449 273.437,36.316 R140.2@308.102,36.316 312.16,36.316 314.833,38.989 314.833,42.643 315.419,43.229 316.005,43.815 321.818,43.815 326.517,48.514 326.517,129.667 318.643,137.541 R104.1@306.711,137.541
  Bottom Layer w1.27: P401H.6@161.925,54.61 P401H.6@167.005,54.61 ; P401K.6@244.348,79.502 P401K.6@249.428,79.502 ; P401J.6@244.348,106.553 P401J.6@249.428,106.553 ; P401I.6@244.348,131.572 P401I.6@249.428,131.572
  Bottom Layer w2: P401D.2@78.486,44.45 P401D.2@83.566,44.45 ; P401H.2@161.925,44.45 P401H.2@167.005,44.45 ; P401L.2@244.348,44.45 P401L.2@249.428,44.45 ; P401L.6@244.348,54.61 P401L.6@244.348,54.737
HIN1: P106.6 P401A.5 | length 136.7
  Bottom Layer w1.016: P401A.5@78.486,129.032 P401A.5@83.566,129.032 83.493,129.105 82.985,129.105 81.978,130.112 81.978,134.938 89.916,142.875 133.477,142.875 169.418,178.816 182.601,178.816 184.785,176.632 P106.6@184.785,173.736
HIN2: P106.4 P401B.5 | length 152.6
  Bottom Layer w1.016: P401B.5@78.486,104.013 P401B.5@83.566,104.013 83.639,104.086 83.639,104.381 86.741,107.483 86.741,135.89 91.567,140.716 133.35,140.716 169.291,176.657 180.594,176.657 182.147,175.104 182.147,173.834 P106.4@182.245,173.736
HIN3: P106.2 P401C.5 | length 219.7
  Bottom Layer w1.016: P401C.5@78.613,76.962 P401C.5@83.693,76.962 85.725,74.93 85.725,54.189 86.32,53.594 130.175,53.594 137.287,60.706 137.287,140.97 169.717,173.4 179.447,173.4 179.705,173.659 P106.2@179.705,173.736
HIN4: P106.1 P401D.5 | length 198
  Bottom Layer w1.016: P401D.5@78.486,52.07 P401D.5@83.566,52.07 132.461,52.07 139.7,59.309 139.7,140.208 170.688,171.196 P106.1@179.705,171.196
HIN5: P106.3 P401E.5 | length 54.9
  Bottom Layer w1: P401E.5@161.925,129.032 P401E.5@167.005,129.032 165.425,130.612 165.425,142.301 182.245,159.12 P106.3@182.245,171.196
HIN6: P106.5 P401F.5 | length 81.5
  Bottom Layer w1.016: P401F.5@161.925,104.013 P401F.5@167.005,104.013 164.719,106.299 164.719,114.341 168.593,118.214 168.593,142.811 184.785,159.004 P106.5@184.785,171.196
HIN7: P106.7 P401G.5 | length 108.4
  Bottom Layer w1.016: P401G.5@161.925,76.962 P401G.5@167.005,76.962 167.005,77.065 167.775,77.835 167.775,78.027 168.593,78.844 168.593,107.211 167.775,108.028 167.775,115.421 169.989,117.636 169.989,142.233 186.182,158.425 186.182,158.496 187.325,159.639 P106.7@187.325,171.196
HIN8: P106.9 P401H.5 | length 134.4
  Bottom Layer w1: P401H.5@161.925,52.07 P401H.5@167.005,52.07 169.164,54.229 169.164,77.452 169.982,78.269 169.982,107.786 169.164,108.603 169.164,114.846 171.379,117.06 171.379,141.658 188.714,158.993 188.714,169.997 189.397,170.68 189.422,170.68 189.865,171.123 P106.9@189.865,171.196
HIN9: P106.17 P401I.5 | length 66.9
  Bottom Layer w1.016: P106.17@200.025,171.196 200.025,171.119 200.456,170.688 200.474,170.688 242.13,129.032 P401I.5@244.348,129.032 P401I.5@249.428,129.032
HIN10: P106.15 P401J.5 | length 91.7
  Bottom Layer w1.016: P106.15@197.485,171.196 197.485,171.119 197.916,170.688 197.934,170.688 242.761,125.861 242.761,119.53 242.76,105.895 243.84,104.816 243.84,104.624 244.348,104.116 P401J.5@244.348,104.013 P401J.5@249.428,104.013
HIN11: P106.13 P401K.5 | length 119.8
  Bottom Layer w1.016: P106.13@194.945,171.196 194.945,171.119 195.376,170.688 195.394,170.688 196.791,169.291 196.85,169.291 241.364,124.777 241.364,120.108 241.363,105.317 242.443,104.237 242.443,78.867 P401K.5@244.348,76.962 P401K.5@249.428,76.962
HIN12: P106.11 P401L.5 | length 145.8
  Bottom Layer w1.016: P106.11@192.405,171.196 192.405,171.119 192.836,170.688 192.854,170.688 194.251,169.291 194.31,169.291 239.967,123.634 239.967,120.687 239.966,104.738 241.046,103.659 241.046,55.372 242.417,54.001 242.417,53.869 243.566,52.721 243.594,52.721 244.245,52.07 P401L.5@249.428,52.07
HINP: P106.8 U402.2 | length 93.4
  Bottom Layer w1.016: U402.2@108.966,169.037 112.959,169.037 118.547,163.449 144.212,163.449 161.357,180.594 185.166,180.594 187.325,178.435 P106.8@187.325,173.736
HN: C405.1 P401A.4 P401B.4 P401C.4 P401D.4 P401E.4 P401F.4 P401G.4 P401H.4 P401I.4 P401J.4 P401K.4 P401L.4 Q401.3 Q402.2 U402.6 | length 56.9
  Top Layer w1.016: Q401.3@54.102,173.482 54.102,174.181 55.879,175.958 76.963,175.958 78.74,174.181 Q402.2@78.74,173.482 78.74,172.783 80.517,171.005 87.915,171.005 88.487,171.577 C405.1@96.393,171.577 U402.6@101.346,171.577
  Bottom Layer w1.016: P401D.4@78.486,49.53 P401D.4@83.566,49.53
HO: Q401.1 U402.7 | length 44.8
  Top Layer w1.016: Q401.1@59.182,173.482 59.182,172.847 63.5,168.529 100.255,168.529 100.763,169.037 U402.7@101.346,169.037
HO1: P401A.1 Q101.1 | length 23.1
  Top Layer w1.016: P401A.1@83.566,118.872 88.773,118.872 91.186,116.459 98.211,116.459 98.806,115.864 Q101.1@98.806,114.3
  Bottom Layer w1.016: P401A.1@78.486,118.872 P401A.1@83.566,118.872
HO2: P401B.1 Q102.1 | length 29.1
  Top Layer w1: P401B.1@83.566,93.853 83.566,90.551 86.487,87.63 91.694,87.63 96.647,92.583 98.093,92.583 98.679,93.169 98.679,95.277
  Bottom Layer w1: P401B.1@78.486,93.853 P401B.1@83.566,93.853
HO3: P401C.1 Q103.1 | length 29.5
  Top Layer w1: P401C.1@83.693,66.802 86.017,69.126 86.017,73.698 88.265,75.946 97.282,75.946 98.552,74.676 98.552,72.263 98.679,72.136
  Bottom Layer w1: P401C.1@78.613,66.802 P401C.1@83.693,66.802
HO4: P401D.1 Q104.1 | length 26.8
  Top Layer w1.016: P401D.1@83.566,41.91 90.805,41.91 98.552,49.657 98.552,53.213
  Bottom Layer w1.016: P401D.1@78.486,41.91 P401D.1@83.566,41.91
HO5: P401E.1 Q105.1 | length 23.8
  Top Layer w1: P401E.1@167.005,118.872 169.164,116.713 181.913,116.713 182.499,116.127 182.499,114.046
  Bottom Layer w1: P401E.1@161.925,118.872 P401E.1@167.005,118.872
HO6: P401F.1 Q106.1 | length 32.4
  Top Layer w1.016: P401F.1@167.005,93.853 167.005,92.202 171.958,87.249 182.158,87.249 182.753,87.844 Q106.1@182.753,95.25
  Bottom Layer w1.016: P401F.1@161.925,93.853 166.878,93.853 167.005,93.98 P401F.1@167.005,93.853
HO7: P401G.1 Q107.1 | length 31.2
  Top Layer w1: P401G.1@167.005,66.802 169.418,69.215 169.418,76.122 170.004,76.708 179.07,76.708 182.499,73.279 182.499,72.263
  Bottom Layer w1: P401G.1@161.925,66.802 P401G.1@167.005,66.802
HO8: P401H.1 Q108.1 | length 27
  Top Layer w1: P401H.1@167.005,41.91 174.117,41.91 182.626,50.419 182.626,53.086
  Bottom Layer w1: P401H.1@161.925,41.91 166.822,41.91 166.878,41.966 166.878,42.037 P401H.1@167.005,41.91
HO9: P401I.1 Q109.1 | length 24.2
  Top Layer w1: P401I.1@249.428,118.872 251.46,116.84 264.668,116.84 265.684,115.824 265.684,114.173
  Bottom Layer w1: P401I.1@244.348,118.872 P401I.1@249.428,118.872
HO10: P401J.1 Q110.1 | length 32.7
  Top Layer w1.016: P401J.1@249.428,93.853 249.428,90.805 253.365,86.868 262.89,86.868 265.557,89.535 265.557,95.25
  Bottom Layer w1.016: P401J.1@244.348,93.853 P401J.1@249.428,93.853
HO11: P401K.1 Q111.1 | length 30.5
  Top Layer w1: P401K.1@249.428,66.802 249.504,66.878 249.504,67.184 252.857,70.537 252.857,74.979 253.443,75.565 264.668,75.565 265.811,74.422 Q111.1@265.811,72.263
  Bottom Layer w1: P401K.1@244.348,66.802 P401K.1@249.428,66.802
HO12: P401L.1 Q112.1 | length 29.1
  Top Layer w1: P401L.1@249.301,41.91 P401L.1@249.428,41.91 259.461,41.91 265.708,48.157 265.708,53.159
  Bottom Layer w1: P401L.1@244.348,41.91 P401L.1@249.428,41.91
IS+1: C111.2 R101.2 U201A.8 | length 9.4
  Top Layer w1.016: R101.2@58.547,147.879 59.182,147.879 60.706,149.403 60.706,152.648 C111.2@60.7,152.654 60.7,152.754 60.408,153.046 60.308,153.046 59.69,153.664 U201A.8@59.69,155.575
IS+2: C112.2 R105.2 U201B.8 | length 8.1
  Top Layer w0.762: R105.2@146.99,83.185 146.99,82.55 147.447,82.093 147.91,82.093 148.812,81.191 149.441,81.191 C112.2@149.86,80.772 150.279,81.191 152.623,81.191 152.654,81.222 U201B.8@152.654,82.062
IS+3: C113.2 R106.2 U201C.8 | length 8.1
  Top Layer w0.762: R106.2@226.873,78.74 226.873,78.105 228.226,76.752 228.943,76.752 C113.2@229.362,76.333 232.388,76.333 232.537,76.482 U201C.8@232.537,77.47
IS+4: C114.2 R107.2 U201D.8 | length 6.9
  Top Layer w0.762: R107.2@313.487,78.486 313.487,77.851 314.846,76.492 315.684,76.492 C114.2@316.103,76.073 316.203,76.073 316.82,76.69 316.82,76.79 317.266,77.236 U201D.8@318.516,77.236
IS-1: C111.1 R101.3 U201A.1 | length 9.7
  Top Layer w1.016: U201A.1@64.79,155.575 64.79,153.944 64.195,153.349 64.095,153.349 63.5,152.754 C111.1@63.5,152.654 63.5,149.758 65.38,147.879 R101.3@66.015,147.879
IS-2: C112.1 R105.3 U201B.1 | length 8
  Top Layer w0.762: R105.3@146.99,75.717 146.99,75.743 147.066,75.819 147.066,76.429 147.447,76.81 148.057,76.81 148.8,77.553 149.441,77.553 C112.1@149.86,77.972 152.623,77.972 152.654,77.941 U201B.1@152.654,76.962
IS-3: C113.1 R106.3 U201C.1 | length 8
  Top Layer w0.762: R106.3@226.873,71.272 226.873,71.907 228.079,73.114 228.943,73.114 C113.1@229.362,73.533 232.362,73.533 232.537,73.358 U201C.1@232.537,72.37
IS-4: C114.1 R107.3 U201D.1 | length 6.9
  Top Layer w0.762: R107.3@313.487,71.018 313.487,71.653 314.687,72.854 315.684,72.854 C114.1@316.103,73.273 316.203,73.273 316.794,72.682 316.794,72.582 317.24,72.136 U201D.1@318.516,72.136
ISO1: R130.2 U101.7 U201A.5 | length 233.6
  Top Layer w0.381: R130.2@268.433,162.859 268.623,162.859 269.188,163.424 269.188,163.614 274.82,169.246 U101.7@284.683,169.246
  Top Layer w0.762: U201A.5@59.69,159.639 62.182,159.639 62.628,160.085 62.628,160.1 63.31,160.782 67.656,160.782 69.022,159.416 69.022,157.927 v3(70.485,156.464) ; v3(266.282,162.904) 266.328,162.859 R130.2@268.433,162.859
  Reg_10_Pos w0.762: v3(70.485,156.464) 73.582,159.561 159.053,159.561 162.396,162.904 v3(266.282,162.904)
ISO2: R129.2 U101.8 U201B.5 | length 212.8
  Top Layer w0.381: v3(274.828,162.904) 274.828,165.608 277.816,168.596 U101.8@284.683,168.596
  Top Layer w0.762: U201B.5@156.464,82.062 156.464,84.709 v3@156.972,85.217 ; R129.2@272.415,162.814 272.46,162.859 274.783,162.859 v3(274.828,162.904)
  Reg_10_Pos w0.762: v3(157.353,85.471) 157.353,155.448 158.75,156.845 273.431,156.845 274.828,158.242 v3@274.828,162.814
ISO3: R125.2 U101.10 U201C.5 | length 137.9
  Top Layer w0.381: R125.2@282.194,162.814 282.194,166.116 283.374,167.296 U101.10@284.683,167.296
  Top Layer w0.762: R125.2@282.194,162.814 282.239,162.859 285.197,162.859 v3(285.242,162.904)
  Top Layer w1.016: U201C.5@236.347,77.47 v3(236.347,80.391)
  Reg_10_Pos w0.762: v3(236.347,80.391) 236.347,147.701 242.316,153.67 281.686,153.67 285.242,157.226 v3@285.242,162.687
ISO4: R127.2 U101.13 U201D.5 | length 109.9
  Top Layer w0.381: U101.13@290.576,168.596 297.449,168.596 300.482,165.563 R127.2@300.482,162.814
  Top Layer w0.762: R127.2@300.482,162.814 300.527,162.859 302.723,162.859 v3(302.768,162.904) ; U201D.5@322.326,77.236 322.326,79.883 v3@323.097,80.654
  Reg_10_Pos w0.762: 302.768,162.259 302.768,158.623 323.215,138.176 v3(323.215,80.772)
LINP: P106.10 U402.3 | length 97.2
  Bottom Layer w1.016: U402.3@108.966,171.577 112.395,171.577 119.126,164.846 143.633,164.846 160.778,181.991 186.69,181.991 189.865,178.816 P106.10@189.865,173.736
LO: Q402.1 U402.5 | length 20.1
  Top Layer w1.016: Q402.1@81.28,173.482 81.343,173.546 U402.5@101.282,173.546 ; U402.5@101.282,174.053 U402.5@101.346,174.117
NetC105_1: C105.1 C106.1 C107.1 R109.1 R140.1 R141.1 | length 21.6
  Top Layer w2: R109.1@141.986,44.196 141.986,50.8 142.113,50.927 ; R141.1@226.06,44.196 C106.1@226.06,48.768 ; R140.1@308.102,39.116 C107.1@308.102,48.768 C107.1@308.102,49.403
NetC105_2: C105.2 L101.2 R105.1
NetC106_2: C106.2 L102.2 R106.1
NetC107_2: C107.2 L103.2 R107.1
NetC108_1: C108.1 R113.1 R143.2 | length 4.6
  Top Layer w1.016: R113.1@152.278,58.547 152.281,58.544 154.682,58.544 C108.1@154.685,58.541 ; R143.2@154.686,56.394 C108.1@154.686,58.541
NetC109_1: C109.1 R116.1 R139.2 | length 5
  Top Layer w0.381: R116.1@233.35,56.49 233.375,56.515 R116.1@233.426,56.515
  Top Layer w1.016: R116.1@233.35,56.49 233.439,56.578 235.775,56.578 235.903,56.451 235.903,54.445 235.941,54.407 235.966,54.432 R139.2@235.966,54.616
NetC110_1: C110.1 R119.1 R142.2 | length 4.7
  Top Layer w1.016: R119.1@318.897,59.055 318.96,58.991 321.119,58.991 C110.1@321.183,58.928 R142.2@321.183,56.521
NetC120_2: C120.2 U101.5 | length 15.4
  Top Layer w0.33: C120.2@269.367,170.688 269.509,170.546 U101.5@284.683,170.546